# Altium PCB PD_SMARTKEY_EMN-EVAN_V2.0.PcbDoc (part 1 of 2)
Units mm, origin at the board's own origin, x right, y up, seen from the top; angles counter-clockwise.
Board outline 43.7 x 59.1 mm, 2 copper layers (Top Layer, Bottom Layer); 132 components, 88 nets, 381 pads, 398 vias.
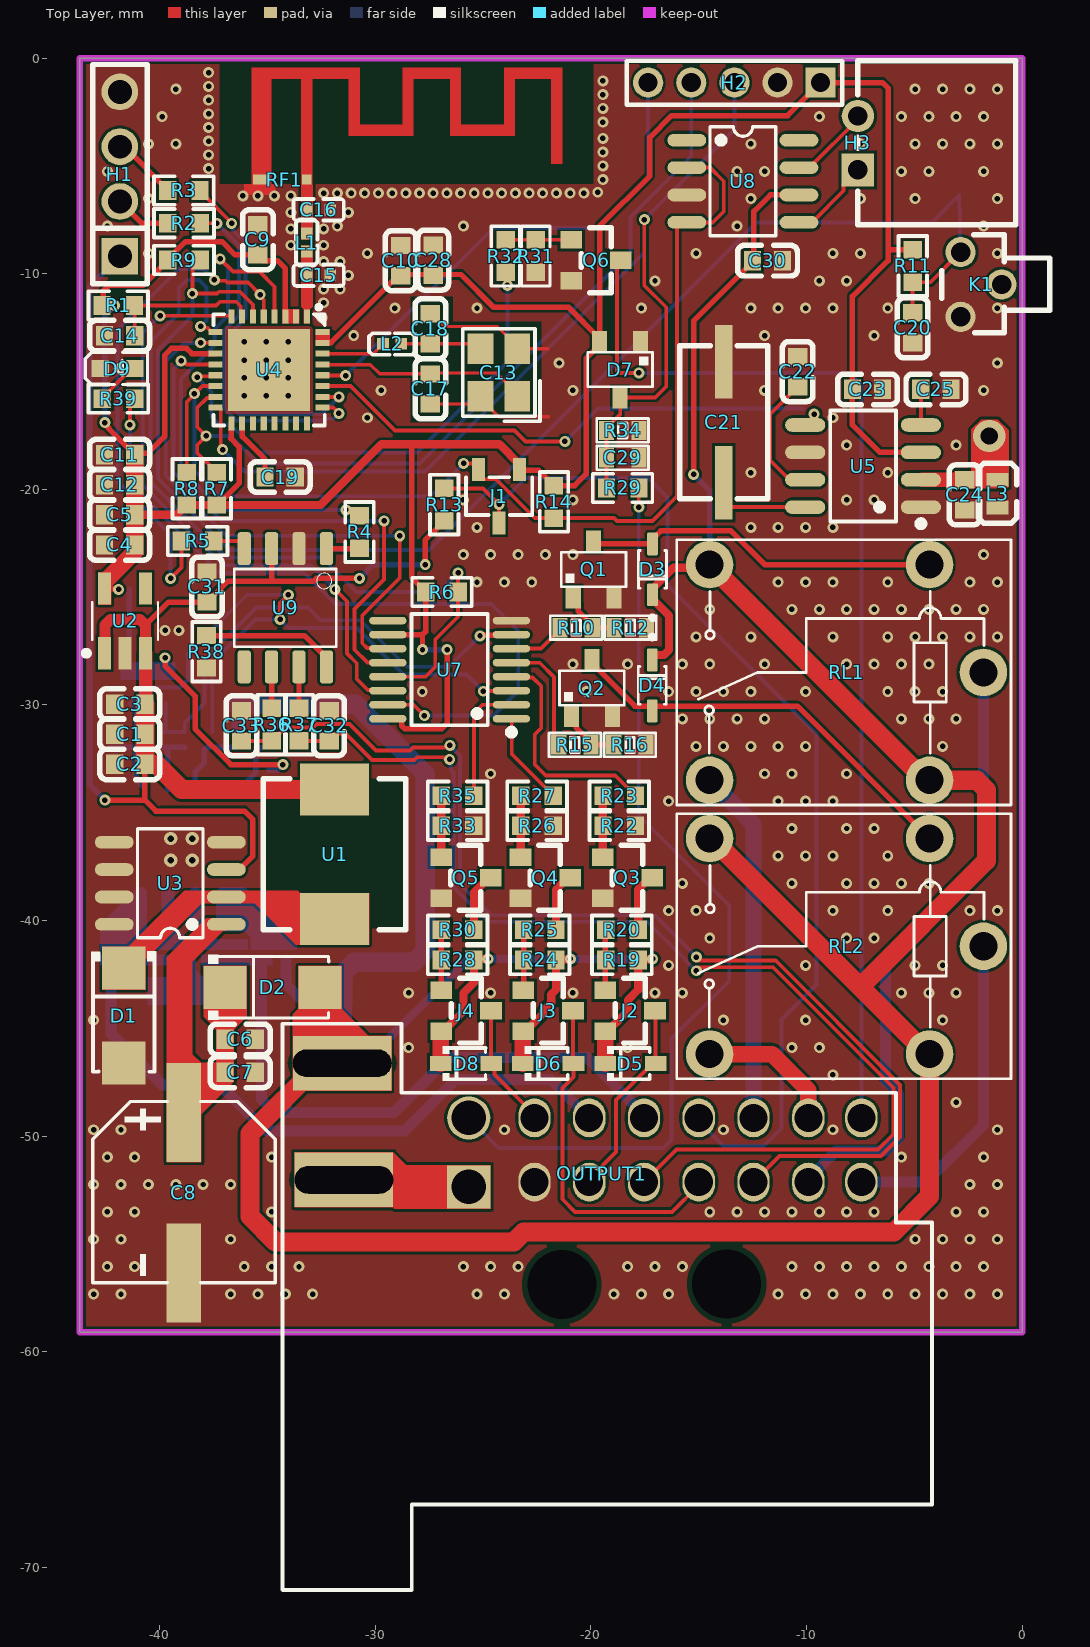
[diagram p0: Top Layer view]
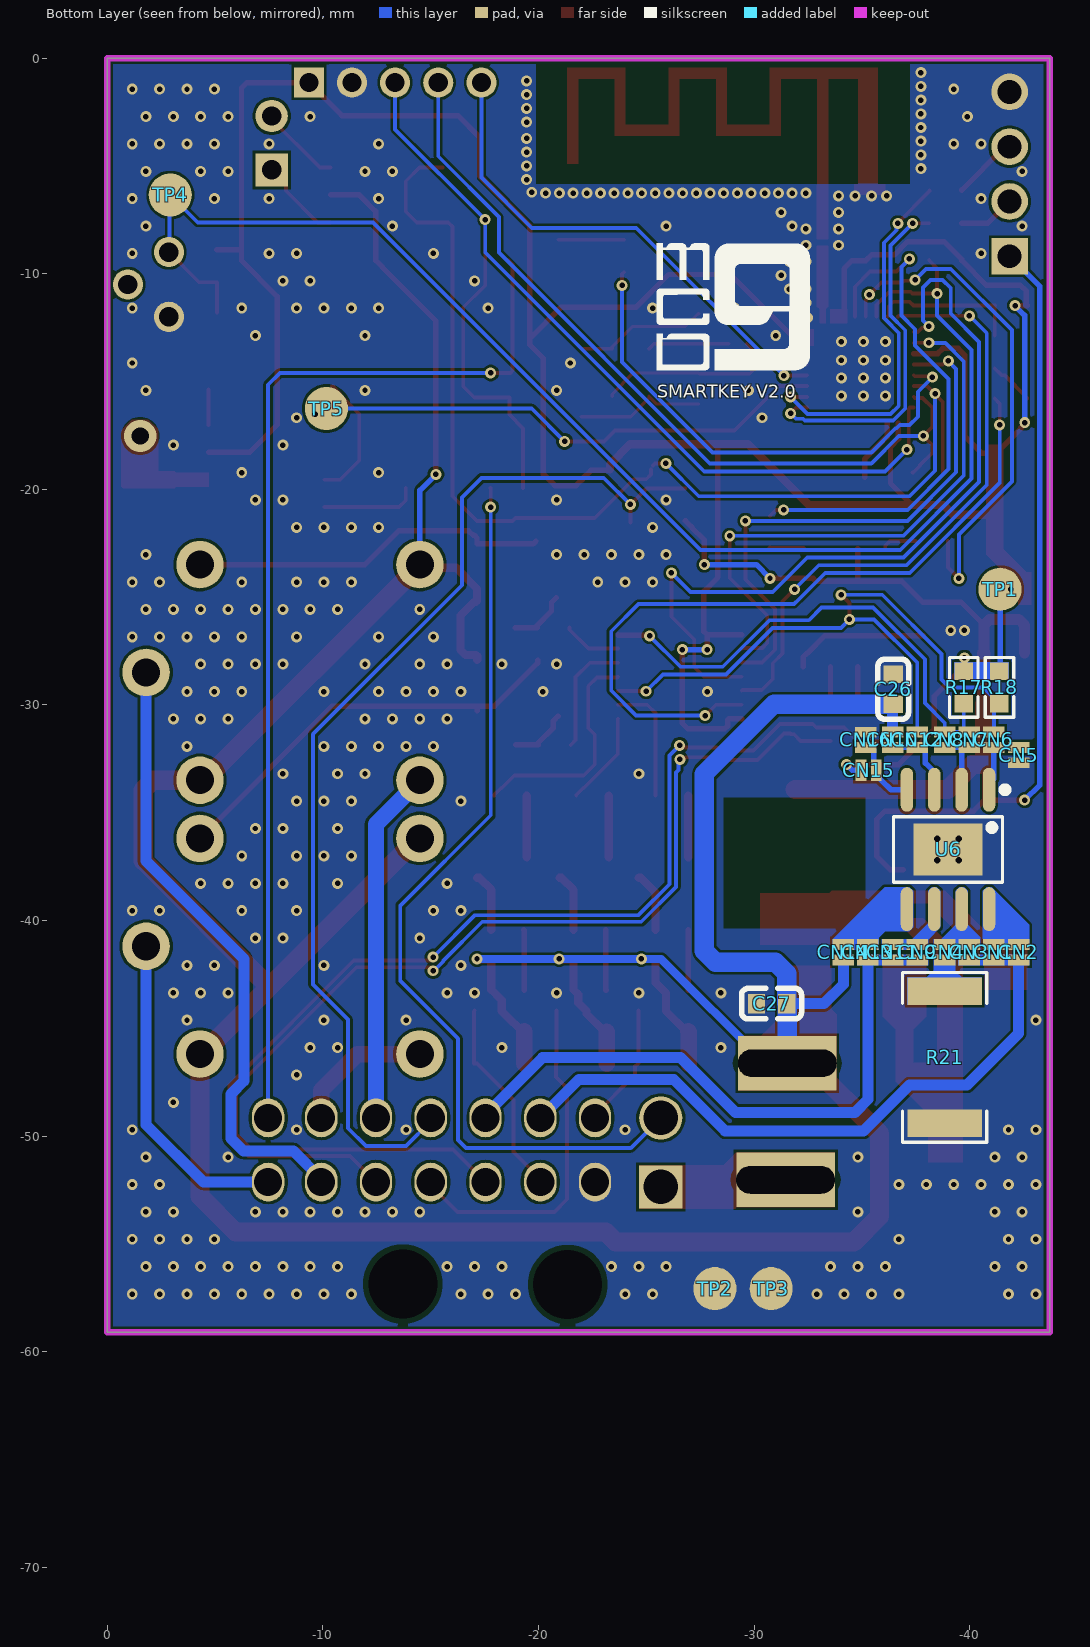
[diagram p1: Bottom Layer view, seen from below]
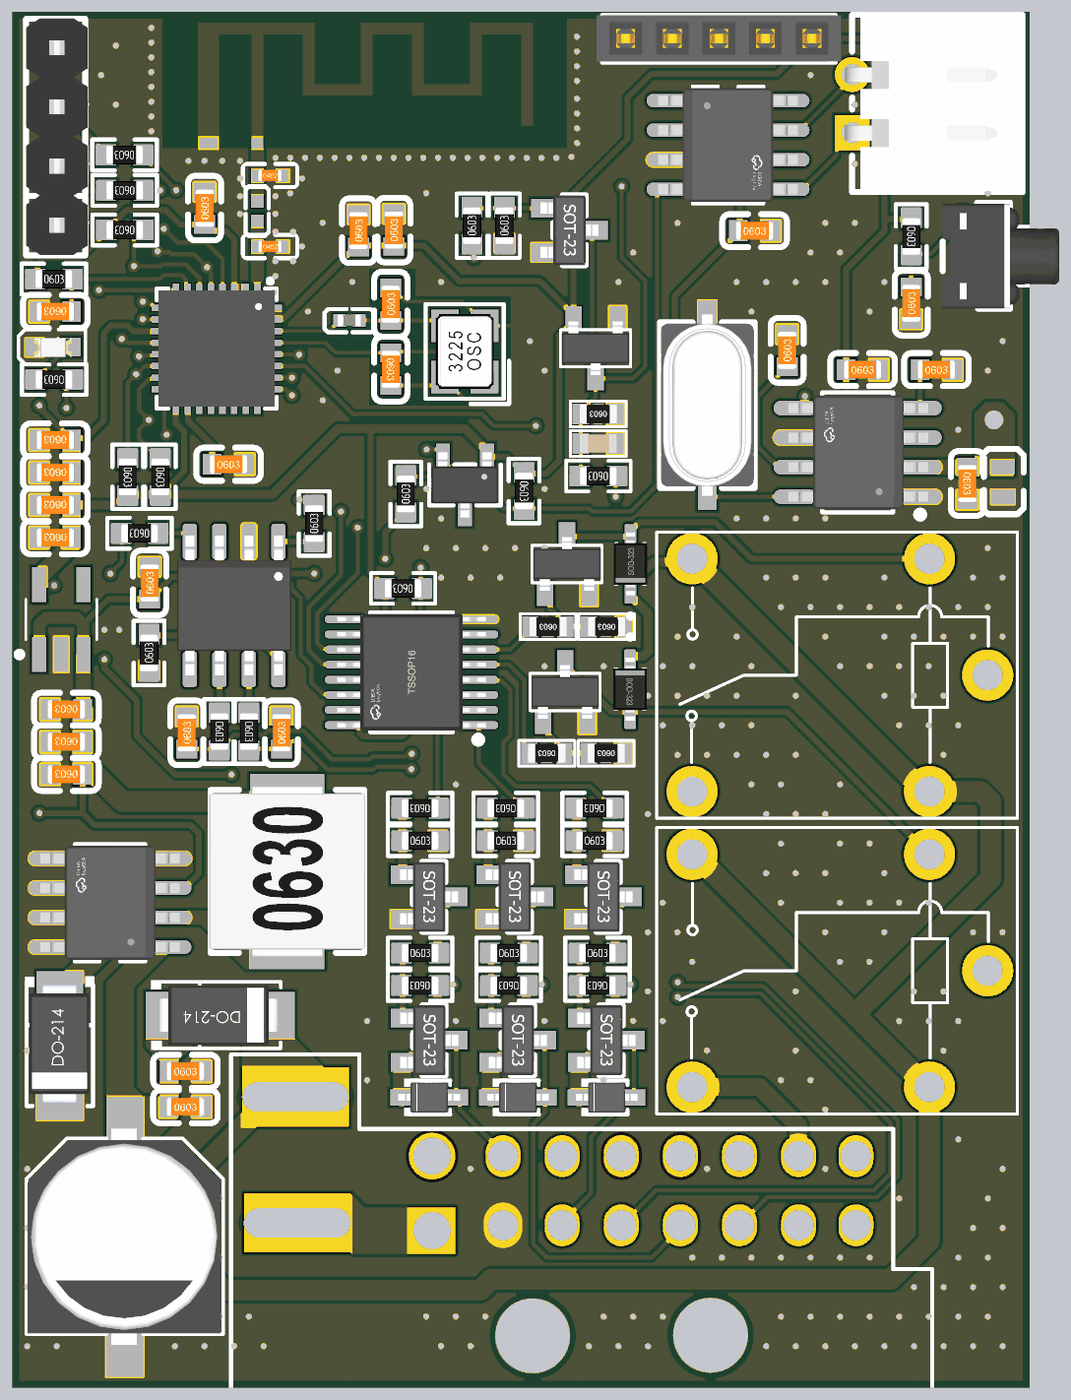
[diagram p3: 3D render of the assembled board from above, using the file's embedded part models]
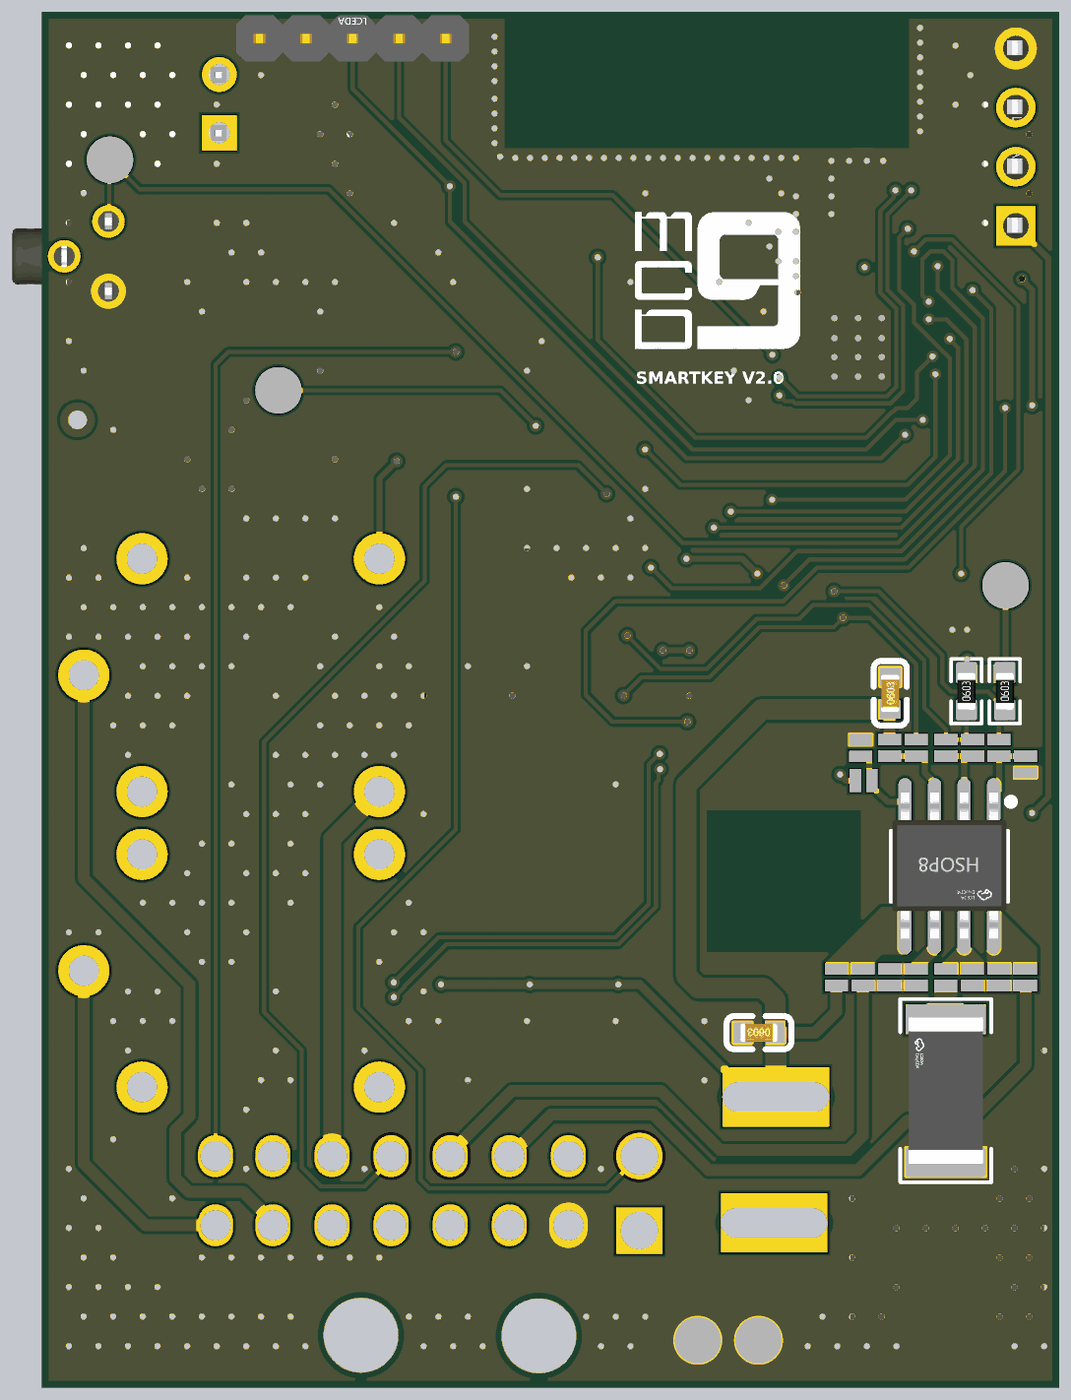
[diagram p4: 3D render of the assembled board from below, using the file's embedded part models]

## Layer stack, top to bottom
Top Solder: solder mask 0.0102, Solder Resist, Dk 3.5
Top Layer: signal copper 0.0356
Dielectric 1: dielectric 0.32, FR-4, Dk 4.8
Bottom Layer: signal copper 0.0356
Bottom Solder: solder mask 0.0102, Solder Resist, Dk 3.5

## Board outline
-43.7,-59.1 -43.7,0 0,0 0,-59.1

## Design rules (kind name [scope] priority, off if disabled: settings)
BoardOutlineClearance [All] p1: gap=0.2 ignorepadtopadclearanceinfootprint=FALSE
Clearance Clearance_2 [InNet('NetC18_1') Or InNet('NetC17_1') vs InNet('GND') And InPolygon] p1: gap=0.115 ignorepadtopadclearanceinfootprint=FALSE
Clearance Clearance_1 [IsTrack vs IsTrack] p2: gap=0.178 ignorepadtopadclearanceinfootprint=FALSE
Clearance [All] p3: gap=0.127 ignorepadtopadclearanceinfootprint=FALSE except(0.25: Arc-Hole Track-Hole SMDPad-Hole THPad-Hole Via-Hole Fill-Hole Poly-Hole Region-Hole Text-Hole)
ComponentClearance [All] p1: gap=0.127 collisioncheckmode=3 verticalgap=0.127 showdistances=TRUE
DiffPairsRouting [All] p1: maxlimit=0.254 minlimit=0.127 mostfreqgap=0.127 toplayer_minwidth=0.127 toplayer_maxwidth=25.4 toplayer_prefwidth=0.127 bottomlayer_minwidth=0.127 bottomlayer_maxwidth=25.4 bottomlayer_prefwidth=0.127 maxuncoupledlength=12.7
Height [All] p1: minheight=0 maxheight=1816.048 prefheight=12.7
HoleSize [All] p1: absolutevalues=TRUE maxlimit=6.3 minlimit=0.025 maxpercent=80.000 minpercent=20.000
HoleToHoleClearance [All] p1: gap=0.013 allowstackedmicrovias=FALSE
MinimumAnnularRing [All] p1: minimumring=0.076
MinimumSolderMaskSliver [All] p1: minsoldermaskwidth=0
PlaneClearance [All] p1: clearance=0.127
PlaneConnect PlaneConnectPowerPads [InPadClass('PowerPads')] p1: planeconnectstyle=Direct reliefexpansion=0.508 reliefentries=4 reliefconductorwidth=0.254 reliefairgap=0.254
PlaneConnect [All] p2: pad.planeconnectstyle=Relief pad.reliefexpansion=0.3 pad.reliefentries=4 pad.reliefconductorwidth=0.127 pad.reliefairgap=0.127 via.planeconnectstyle=Direct via.reliefexpansion=0.3 via.reliefentries=4 via.reliefconductorwidth=0.127 via.reliefairgap=0.127
PolygonConnect PolygonConnectPowerPads [All vs (InPadClass('PowerPads'))] p1: connectstyle=Direct reliefconductorwidth=0.254 reliefentries=4 polygonreliefangle="90 Angle" airgapwidth=0.254
PolygonConnect [All] p2: connectstyle=Direct reliefconductorwidth=0.127 reliefentries=4 polygonreliefangle="90 Angle" airgapwidth=0.127
RoutingVias [All] p1: holewidth=0.254 width=0.508 viastyle="Through Hole" minholewidth=0.254 minwidth=0.508 maxholewidth=0.254 maxwidth=0.508
SilkToSilkClearance [All] p1: silktosilkclearance=0
SilkToSolderMaskClearance [IsPad] p1: minsilkscreentomaskgap=0.127 clearancetoexposedcopper=TRUE
SolderMaskExpansion [All] p1: expansion=0.075 istentingtop=FALSE
Width [All] p1: maxlimit=25.4 minlimit=0.127 preferedwidth=0.127 minimp=50.000000 maximp=50.000000 favimp=50.000000
20 further rules are at their usual default settings.

## Classes and differential pairs
component class "Voltage Source": C1 C2 C3 C4 C5 C6 C7 C8 D1 D2 TP1 U1 U2 U3
component class Peripheral: C20 C21 C22 C23 C24 C25 C26 C27 C28 C29 C30 C31 C32 C33 CN1 CN2 CN3 CN4 CN5 CN6 CN7 CN8 CN9 CN10 CN11 CN12 CN13 CN14 CN15 CN16 D3 D4 D5 D6 D7 D8 D9 H2 J1 J2 J3 J4 K1 L3 Q1 Q2 Q3 Q4 Q5 Q6 R10 R11 R12 R13 R14 R15 R16 R17 R18 R19 R20 R21 R22 R23 R24 R25 R26 R27 R28 R29 R30 R31 R32 R33 R34 R35 R36 R37 R38 R39 RL1 RL2 TP4 TP5 U5 U6 U7 U8 U9
component class "Micro Controller": C9 C10 C11 C12 C13 C14 C15 C16 C17 C18 C19 H1 L1 L2 R1 R2 R3 R4 R5 R6 R7 R8 R9 RF1 TP2 TP3 U4
component class Connector: H3 OUTPUT1
differential pair CAN: +CAN_P -CAN_N
differential pair D: +D_P -D_N

## Components (designator, comment, footprint, x,y, rotation, side; value= is the part's Value field where it differs from the comment)
C1 "10uF" C0603 -41.385,-31.357 r180 top
C2 "100pF" C0603 -41.385,-32.754 r180 top
C3 "10uF" C0603 -41.385,-29.96 r180 top
C4 "10uF" C0603 -41.86,-22.582 r180 top
C5 "100nF" C0603 -41.86,-21.185 r180 top
C6 "10uF" C0603 -36.269,-45.511 r0 top
C7 "100pF" C0603 -36.269,-47.035 r0 top
C8 "220uF" C_220uF_35V_SMD -38.874,-52.623 r270 top
C9 "1uF" C0603 -35.445,-8.427 r90 top
C10 "10uF" C0603 -28.829,-9.398 r90 top
C11 "10uF" C0603 -41.86,-18.391 r180 top
C12 "100nF" C0603 -41.86,-19.788 r180 top
C13 "XL2EL89CPI-111YLC-40M" XL2EL89CPI-111YLC-40M -24.269,-14.585 r90 top
C14 "1uF" C0603 -41.86,-12.872 r180 top
C15 "NC" C0402 -32.63,-10.078 r0 top
C16 "NC" C0402 -32.63,-7.03 r0 top
C17 "12pF" C0603 -27.444,-15.347 r270 top
C18 "12pF" C0603 -27.444,-12.553 r90 top
C19 "100nF" C0603 -34.417,-19.431 r0 top
C20 "100nF" C0603 -5.08,-12.511 r90 top
C21 "6.7458M 12PF 20PPM" "6.7458M 12PF 20PPM" -13.843,-16.891 r90 top
C22 "4.7uF" C0603 -10.414,-14.54 r90 top
C23 "10uF" C0603 -7.174,-15.367 r0 top
C24 "8.2pF" C0603 -2.667,-20.258 r270 top
C25 "2.2uF" C0603 -3.999,-15.367 r0 top
C26 "100nF" C0603 -36.449,-29.272 r90 bottom
C27 "100nF" C0603 -30.807,-43.854 r0 bottom
C28 "10uF" C0603 -27.313,-9.371 r90 top
C29 "100nF" C-0603 -18.53,-18.542 r180 top value=103
C30 "10uF" C0603 -11.811,-9.398 r0 top
C31 "100nF" C0603 -37.807,-24.531 r90 top
C32 "12pF" C0603 -32.143,-30.968 r90 top
C33 "12pF" C0603 -36.207,-30.968 r90 top
CN1 "CN" CN -41.119,-41.472 r270 top
CN2 "CN" CN -42.262,-41.472 r270 top
CN3 "CN" CN -39.976,-41.472 r270 top
CN4 "CN" CN -38.833,-41.472 r270 top
CN5 "CN" CN -42.262,-32.328 r90 top
CN6 "CN" CN -41.119,-31.616 r270 top
CN7 "CN" CN -39.984,-31.616 r270 top
CN8 "CN" CN -38.841,-31.616 r270 top
CN9 "CN" CN -37.563,-41.472 r270 top
CN10 "CN" CN -36.42,-31.616 r270 top
CN11 "CN" CN -36.42,-41.472 r270 top
CN12 "CN" CN -37.563,-31.616 r270 top
CN13 "CN" CN -35.277,-41.472 r270 top
CN14 "CN" CN -34.134,-41.472 r270 top
CN15 "CN" CN -35.306,-33.02 r180 top
CN16 "CN" CN -35.179,-31.623 r270 top
D1 "SS34" SS34 -41.668,-44.409 r270 top
D2 "SS34" SS34 -34.769,-43.098 r0 top
D3 "1N5819" SOD-323 -17.145,-23.712 r90 top value=1N5007
D4 "1N5819" SOD-323 -17.16,-29.097 r270 top value=1N5007
D5 "1N4007WS" 1N4007WS -18.173,-46.635 r0 top
D6 "1N4007WS" 1N4007WS -21.983,-46.635 r0 top
D7 "BAT54S" SOT23-3 -18.645,-14.448 r180 top
D8 "1N4007WS" 1N4007WS -25.793,-46.635 r0 top
D9 "RED" LED0603 -41.959,-14.4 r0 top
H1 "PZ2.54-S04P-A60" J_4P_XH2.54 -41.846,-5.379 r90 top
H2 "HC-PM200-4.3H-1x5PZ" JC_5P_XH2.0 -13.347,-1.15 r180 top
H3 "ZX-XH2.54-2PWZ" ZX-XH2.54-2PWZ -7.62,-3.937 r90 top
J1 "BSS138" BSS138 -24.257,-20.32 r90 top
J2 "AO3401A" AO3401 -18.18,-44.18 r180 top
J3 "AO3401A" AO3401 -21.983,-44.18 r180 top
J4 "AO3401A" AO3401 -25.786,-44.18 r180 top
K1 "TS-1009B-05026" TS-1009B-05026 -1.905,-10.5 r90 top
L1 "LQG15HS1N0B02D" L0402_1nH -33.175,-8.554 r270 top
L2 "LQW15AN24NG00D" LQW15AN24NG00D -29.222,-13.253 r0 top
L3 "16,6nH" L_16,6nH_0603 -1.143,-20.18 r90 top
OUTPUT1 "JP9x2" 9x2_JP200 -19.09,-58.504 r0 top locked
Q1 "AO3402" SOT23-3 -19.873,-23.719 r0 top
Q2 "AO3402" SOT23-3 -19.954,-29.217 r0 top
Q3 "AO3402" AO3402 -18.307,-38.018 r180 top
Q4 "AO3402" AO3402 -22.117,-38.018 r180 top
Q5 "AO3402" AO3402 -25.8,-38.018 r180 top
Q6 "AO3402" AO3402 -19.759,-9.379 r180 top
R1 "10kΩ" R0603 -41.922,-11.475 r0 top
R2 "22" R0603 -38.874,-7.665 r180 top
R3 "22" R0603 -38.883,-6.141 r180 top
R4 "33Ω" R0603 -30.734,-21.98 r90 top
R5 "33Ω" R0603 -38.239,-22.397 r180 top
R6 "10kΩ" R0603 -26.915,-24.765 r180 top
R7 "10kΩ" R0603 -37.35,-19.975 r270 top
R8 "10kΩ" R0603 -38.747,-19.975 r270 top
R9 "10kΩ" R0603 -38.874,-9.367 r180 top
R10 "1K" RES-SMD-0603 -20.689,-26.416 r180 top
R11 "10kΩ" R0603 -5.08,-9.643 r270 top
R12 "10K" RES-SMD-0603 -18.173,-26.416 r180 top
R13 "10kΩ" R0603 -26.797,-20.71 r90 top
R14 "10kΩ" R0603 -21.717,-20.583 r270 top
R15 "1K" RES-SMD-0603 -20.744,-31.853 r180 top
R16 "10K" RES-SMD-0603 -18.192,-31.853 r180 top
R17 "10kΩ" R0603 -39.722,-29.187 r90 bottom
R18 "10kΩ" R0603 -41.373,-29.187 r90 bottom
R19 "10kΩ" R0603 -18.563,-41.828 r180 top
R20 "5k1Ω" R0603 -18.563,-40.431 r0 top
R21 "FRC2512P000 TS" "R_2512_0O ±5%" -38.833,-46.341 r270 bottom
R22 "10kΩ" R0603 -18.69,-35.605 r0 top
R23 "1kΩ" R0603 -18.69,-34.208 r180 top
R24 "10kΩ" R0603 -22.373,-41.828 r180 top
R25 "5k1Ω" R0603 -22.373,-40.431 r0 top
R26 "10kΩ" R0603 -22.5,-35.605 r0 top
R27 "1kΩ" R0603 -22.5,-34.208 r180 top
R28 "10kΩ" R0603 -26.183,-41.828 r180 top
R29 "33kΩ" R0603 -18.527,-19.939 r180 top
R30 "5k1Ω" R0603 -26.183,-40.431 r0 top
R31 "10kΩ" R0603 -22.56,-9.182 r90 top
R32 "1kΩ" R0603 -23.957,-9.182 r90 top
R33 "10kΩ" R0603 -26.183,-35.605 r0 top
R34 "10K" RES-SMD-0603 -18.53,-17.272 r180 top
R35 "1kΩ" R0603 -26.183,-34.208 r180 top
R36 "33Ω" R0603 -34.81,-30.915 r270 top
R37 "33Ω" R0603 -33.54,-30.915 r270 top
R38 "33Ω" R0603 -37.833,-27.536 r90 top
R39 "1kΩ" R0603 -41.913,-15.793 r180 top
RF1 "" 2.4GHZ-50OHMS_v1.1 -35.278,-5.862 r0 top
RL1 "SRA-12VDC-CL" YL318-DC12V-C -8.267,-28.493 r0 top value="Relay SPDT, 10A, 12V"
RL2 "SRA-12VDC-CL" YL318-DC12V-C -8.267,-41.193 r0 top value="Relay SPDT, 10A, 12V"
TP1 "TP" TP -41.402,-24.638 r0 top
TP2 "TP" TP -28.178,-57.071 r0 top
TP3 "TP" TP -30.787,-57.071 r0 top
TP4 "TP" TP -2.921,-6.35 r0 top
TP5 "TP" TP -10.16,-16.256 r0 top
U1 "XR0630-4R7M" SMD,7x6.6mm -31.889,-36.923 r90 top
U2 "AP2112K-3.3TRG1" SOT23-5 -41.602,-26.104 r90 top
U3 "XXL1509-5.0" XXL1509-5.0 -39.509,-38.272 r90 top
U4 "ESP32-C3" ESP32-C3 -34.925,-14.461 r270 top
U5 "SYN480R" SYN480R -7.381,-18.923 r90 top
U6 "DRV8870DDAR" DRV8870DDAR -38.989,-36.703 r0 bottom
U7 "74HC595PW,118" 74HC595PW,118 -26.555,-28.366 r90 top
U8 "TC4428AEOA" TC4428AEOA -12.954,-5.715 r270 top
U9 "SIT1040T" SO8 -34.175,-25.496 r180 top

## Footprints (in the part's own frame and the unit in brackets; to place one, negate y for a bottom-side part, rotate by r counter-clockwise, add the part's x,y. Pads: shape width x height; smd on the part's side, far side on the other; paste and mask are expansions set on the pad)
1N4007WS [mm] "DIODE STANDARD 1kV 1A SOD-323"
  rect 1x0.7 smd paste+0 mask+0.051: 1(-1.173,0) 2(1.173,0)
  silkscreen extent -1.08,-0.8 0.9,0.8, body extent -1.33,-0.65 1.33,0.65, height 1.21
2.4GHZ-50OHMS_v1.1 [mm]
  rect 0.45x0.45 smd: 1(2.103,0.229)
  rect 0.8x0.45 smd: 2(0,0.229)
  Top Layer region: 13.947,0.963 13.447,0.963 13.447,4.903 11.747,4.903 11.747,2.263 8.747,2.263 8.747,4.903 7.047,4.903 7.047,2.263 4.047,2.263 4.047,4.903 2.347,4.903 2.347,0.003 1.847,0.003 1.847,4.903 0.447,4.903 0.447,0.003 -0.453,0.003 -0.453,5.403 4.547,5.403 4.547,2.763 6.547,2.763 6.547,5.403 9.247,5.403 9.247,2.763 11.247,2.763 11.247,5.403 13.947,5.403
"6.7458M 12PF 20PPM" [mm] "CRYSTAL 6.7458MHz 12pF SMD"
  rect 3.4x0.8 smd paste+0 mask+0.05: 1(-2.8,0) 2(2.8,0)
  silkscreen extent -3.56,-2.03 3.56,2.03, body extent -3.9,-2 3.9,2, height 2.35
9x2_JP200 [mm]
  rect 2x2 hole 1.6 paste-2539.97: 1(-6.579,6.147)
  oval 1.5x1.8 hole 1.3: 2(-3.531,6.375) 3(-0.991,6.375) 4(1.549,6.375) 5(4.089,6.375) 6(6.629,6.375) 7(9.169,6.375) 8(11.633,6.375) 9(11.633,9.347) 10(9.169,9.347) 11(6.629,9.347) 14(-0.991,9.347) 15(-3.531,9.347)
  oval 1.5x1.8 hole 1.3 mask+0.127: 12(4.089,9.347) 13(1.549,9.347)
  round 2 hole 1.6 mask+0.127: 16(-6.579,9.347)
  rect 4.572x2.54 hole 1.27 slot 4.572 at 0 deg: 17(-12.446,11.887) 18(-12.37,6.477)
  round 1.524 hole 3.2: ""(-2.261,1.626) ""(5.385,1.651)
  silkscreen extent -15.21,-12.55 14.91,13.72, body extent -15.21,-12.55 14.91,13.72, height 17
74HC595PW,118 [mm] "8-bit serial-in, serial or parallel-out shift register with output latches; 3-state"
  oval 0.343x1.731 smd paste+0 mask+0.051: 1(-2.275,-2.866) 2(-1.625,-2.866) 3(-0.975,-2.866) 4(-0.325,-2.866) 5(0.325,-2.866) 6(0.975,-2.866) 7(1.625,-2.866) 8(2.275,-2.866) 9(2.275,2.866) 10(1.625,2.866) 11(0.975,2.866) 12(0.325,2.866) 13(-0.325,2.866) 14(-0.975,2.866) 15(-1.625,2.866) 16(-2.275,2.866)
  silkscreen extent -3.05,-3.02 2.58,1.77, body extent -2.5,-3.2 2.5,3.2, height 1.03
AO3401 [mm]
  rect 1x0.8 smd paste+0 mask+0.051: 1(1.15,-0.95) 2(1.15,0.95) 3(-1.15,0)
  silkscreen extent -0.7,-1.5 0.7,1.5, body extent -1.25,-1.5 1.25,1.5, height 1.1
AO3402 [mm] "MOSFET N-CH 30V SOT-23"
  rect 1x0.8 smd paste+0 mask+0.051: 1(1.15,-0.95) 2(1.15,0.95) 3(-1.15,0)
  silkscreen extent -0.7,-1.5 0.7,1.5, body extent -1.25,-1.5 1.25,1.5, height 1.1
BSS138 [mm] "MOSFET N-CH 50V 0.22A SOT-23"
  rect 1.07x0.6 smd paste+0 mask+0.051: 1(1.235,-0.95) 2(1.235,0.95) 3(-1.235,0)
  silkscreen extent -0.88,-1.54 0.88,1.54, body extent -1.4,-1.45 1.4,1.45, height 1.1
C0402 [mm]
  rect 0.54x0.54 smd paste-100 mask+0.051: 1(-0.545,0) 2(0.545,0)
  silkscreen extent -1.17,-0.5 1.17,0.5, body extent -0.5,-0.25 0.5,0.25, height 0.36
C0603 [mm]
  rect 0.8x0.9 smd: 1(-0.7,0) 2(0.7,0)
  silkscreen extent -1.39,-0.71 1.39,0.71, body extent -0.8,-0.4 0.8,0.4, height 0.4
C-0603 [mm]
  rect 0.7x0.9 smd: 1(-0.75,0) 2(0.75,0)
  silkscreen extent -1.2,-0.55 1.2,0.55, body extent -0.8,-0.4 0.8,0.4, height 0.8
C_220uF_35V_SMD [mm] "CAP ALUM 220uF ±20% 35V SMD"
  rect 4.6x1.6 smd paste+0 mask+0.051: 1(-3.724,0) 2(3.724,0)
  silkscreen extent -4.23,-4.23 4.18,4.23, body extent -4.65,-4.18 4.65,4.12, height 10.13
CN [mm]
  rect 0.5x1 smd far side paste+0 mask+0.051: 1(-0.356,0) 2(0.356,0)
DRV8870DDAR [mm] "Brushed DC motor driver (PWM control)"
  oval 0.574x2.038 smd paste+0 mask+0.051: 1(-1.905,-2.769) 2(-0.635,-2.769) 3(0.635,-2.769) 4(1.905,-2.769) 5(1.905,2.769) 6(0.635,2.769) 7(-0.635,2.769) 8(-1.905,2.769)
  rect 3.2x2.4 smd paste+0 mask+0.051: 9(0,0)
  silkscreen extent -2.79,-2.92 2.53,1.52, body extent -2.45,-3.18 2.45,3.12, height 1.9
ESP32-C3 [mm] "Others 160MHz QFN-32-EP(5x5) RF Transceiver Modules and Modems RoHS"
  rect 0.65x0.28 smd paste-100 mask+0.051: 1(-2.478,1.75) 2(-2.478,1.25) 3(-2.478,0.75) 4(-2.478,0.25) 5(-2.478,-0.25) 6(-2.478,-0.75) 7(-2.478,-1.25) 8(-2.478,-1.75) 17(2.478,-1.75) 18(2.478,-1.25) 19(2.478,-0.75) 20(2.478,-0.25) 21(2.478,0.25) 22(2.478,0.75) 23(2.478,1.25) 24(2.478,1.75)
  rect 0.28x0.65 smd paste-100 mask+0.051: 9(-1.75,-2.478) 10(-1.25,-2.478) 11(-0.75,-2.478) 12(-0.25,-2.478) 13(0.25,-2.478) 14(0.75,-2.478) 15(1.25,-2.478) 16(1.75,-2.478) 25(1.75,2.478) 26(1.25,2.478) 27(0.75,2.478) 28(0.25,2.478) 29(-0.25,2.478) 30(-0.75,2.478) 31(-1.25,2.478) 32(-1.75,2.478)
  rect 3.8x3.8 smd paste-100 mask+0.051: 33(0,0)
  silkscreen extent -3,-2.58 2.58,2.58, body extent -2.5,-2.5 2.5,2.5, height 0.9
J_4P_XH2.54 [mm] "1kV 1 2.54mm Pin Header 3A 2.5mm Through Hole 6mm -40?~+105? 3mm Gold 4P Black 1x4P Through Hole,P=2.54mm Headers, Male Pins RoHS"
  rect 1.7x1.7 hole 1.1 paste-2539.97 mask+0.051: 1(-3.81,0)
  round 1.7 hole 1.1 paste-2539.97 mask+0.051: 2(-1.27,0) 3(1.27,0) 4(3.81,0)
  silkscreen extent -5.08,-1.27 5.08,1.27, body extent -5.05,-1.38 5.12,1.28, height 8.54
JC_5P_XH2.0 [mm] "CONN SOCKET 5POS 2mm SINGLE ROW TH"
  rect 1.4x1.4 hole 0.889 paste-2539.97 mask+0.051: 1(-4,-0.013)
  round 1.4 hole 0.889 paste-2539.97 mask+0.051: 2(-2,-0.013) 3(0,-0.013) 4(2,-0.013) 5(4,-0.013)
  silkscreen extent -5,-1.01 5,1.01, body extent -5.25,-1.01 5.26,0.99, height 6.35
L0402_1nH [mm]
  rect 0.54x0.54 smd paste+0 mask+0.051: 1(-0.42,0) 2(0.42,0)
  silkscreen extent -1.07,-0.51 1.07,0.49
L_16,6nH_0603 [mm] "700mA 16nH ±5% 170mO Wire-wound inductor 0603 Fixed Inductors"
  rect 0.64x1.02 smd paste+0 mask+0.051: 1(-0.658,0) 2(0.622,0)
  silkscreen extent -1.4,-0.89 1.4,0.89
LED0603 [mm]
  rect 0.8x0.8 smd paste+0 mask+0.051: 1(-0.799,-0.004) 2(0.799,0.004)
  silkscreen extent -1.49,-0.75 1.39,0.76, body extent -0.8,-0.42 0.8,0.38, height 0.7
LQW15AN24NG00D [mm] "FIXED IND 24nH 280mA 520mO 0402"
  rect 0.54x0.54 smd paste+0 mask+0.051: 1(-0.42,0) 2(0.42,0)
  silkscreen extent -1.07,-0.51 1.07,0.49, body extent -0.5,-0.25 0.5,0.25, height 0.5
R0603 [mm]
  rect 0.806x0.864 smd paste-100 mask+0.051: 1(-0.753,0) 2(0.753,0)
  silkscreen extent -1.39,-0.66 1.39,0.66, body extent -0.8,-0.4 0.8,0.4, height 0.45
"R_2512_0O ±5%" [mm] "RES 0O ±5% 1W 2512"
  rect 1.283x3.456 smd paste-100 mask+0.051: 1(-3.066,0) 2(3.066,0)
  silkscreen extent -3.94,-1.96 3.94,1.96, body extent -3.15,-1.6 3.15,1.6, height 0.61
RES-SMD-0603 [mm]
  rect 0.7x0.9 smd: 1(-0.75,0) 2(0.75,0)
  silkscreen extent -1.2,-0.55 1.2,0.55, body extent -0.8,-0.4 0.8,0.4, height 0.43
SMD,7x6.6mm [mm] "FIXED IND 4.7uH 6A 33mO SMD,0630"
  rect 2.4x3.2 smd paste+0 mask+0.051: 1(-3,0) 2(3,0)
  silkscreen extent -3.5,-3.3 3.5,3.3, body extent -3.65,-3.35 3.65,3.35, height 3.01
SO8 [mil]
  rrect40% 24x60 smd: 1(-75,-108) 2(-25,-108) 3(25,-108) 4(75,-108) 5(75,108) 6(25,108) 7(-25,108) 8(-75,108)
  silkscreen extent -93,-71 93,71, body extent -96,-118 96,118, height 69
SOD-323 [mm]
  rrect25% 1.06x0.5 smd: 1(1.18,0) 2(-1.18,0)
  silkscreen extent -2.35,-0.65 0.87,0.65, body extent -1.35,-0.72 1.35,0.72, height 1.17
SOT23-3 [mm]
  rect 0.7x1 smd: 1(-0.95,-1.3) 2(0.95,-1.3) 3(0,1.3)
  silkscreen extent -1.5,-0.8 1.5,0.8, body extent -1.45,-1.15 1.45,1.15, height 1.1
SOT23-5 [mm]
  rect 1.5x0.6 smd: 1(-1.5,0.95) 2(-1.5,0) 3(-1.5,-0.95) 4(1.5,-0.95) 5(1.5,0.95)
  silkscreen extent -1.62,-1.52 0.87,1.92, body extent -1.75,-1.52 1.75,1.53, height 1.45
SS34 [mm]
  rect 2x2 smd paste+0 mask+0.051: 1(-2.2,0) 2(2.2,0)
  silkscreen extent -2.98,-1.5 2.6,1.5, body extent -2.65,-1.29 2.49,1.27, height 2.63
SYN480R [mm] "433/315 MHz wireless receiver chips"
  oval 0.63x1.865 smd paste+0 mask+0.051: 1(-1.905,-2.682) 2(-0.635,-2.682) 3(0.635,-2.682) 4(1.905,-2.682) 5(1.905,2.682) 6(0.635,2.682) 7(-0.635,2.682) 8(-1.905,2.682)
  silkscreen extent -2.82,-2.83 2.58,1.52, body extent -2.45,-3.03 2.45,2.97, height 1.49
TC4428AEOA [mm] "1.5A Dual High-Speed Power MOSFET Drivers"
  oval 0.588x1.8 smd paste+0 mask+0.051: 1(-1.905,-2.6) 2(-0.635,-2.6) 3(0.635,-2.6) 4(1.905,-2.6) 5(1.905,2.6) 6(0.635,2.6) 7(-0.635,2.6) 8(-1.905,2.6)
  silkscreen extent -2.53,-1.52 2.53,1.52, body extent -2.45,-3 2.45,3, height 1.51
TP [mm]
  round 2 smd far side paste+0 mask+0.051: 1(0,0)
TS-1009B-05026 [mm] "SWITCH TACTILE SPST TH R/A"
  round 1.4 hole 0.9 paste-2539.97 mask+0.051: 1(1.5,0.95) 2(-1.5,0.95) 3(0,-0.95)
  silkscreen extent -2.25,-3.18 2.3,1.83, body extent -2.25,-3.17 2.25,1.83, height 4.51
XL2EL89CPI-111YLC-40M [mm] "CRYSTAL 40MHz 15pF SMD"
  rect 1.4x1.2 smd paste+0 mask+0.051: 1(-1.1,-0.85) 2(1.1,-0.85) 3(1.1,0.85) 4(-1.1,0.85)
  silkscreen extent -2.26,-1.91 2.03,1.68, body extent -1.6,-1.25 1.6,1.25, height 0.68
XXL1509-5.0 [mm] "150KHz 3A PWM Buck DC/DC Converter"
  oval 0.588x1.8 smd paste+0 mask+0.051: 1(-1.905,-2.6) 2(-0.635,-2.6) 3(0.635,-2.6) 4(1.905,-2.6) 5(1.905,2.6) 6(0.635,2.6) 7(-0.635,2.6) 8(-1.905,2.6)
  silkscreen extent -2.53,-1.52 2.53,1.52, body extent -2.45,-3 2.45,3, height 1.51
YL318-DC12V-C [mm]
  round 2.2 hole 1.3: 1(6.47,0) 2(-6.23,-5) 3(-6.23,5) 4(3.97,5) 5(3.97,-5)
  silkscreen extent -7.75,-6.15 7.75,6.15, body extent -7.75,-6.15 7.75,6.15, height 13.5
ZX-XH2.54-2PWZ [mm] "CONN HEADER TH R/A 2POS 2.5mm"
  rect 1.524x1.5 hole 0.9 paste-2539.97 mask+0.05: 1(-1.25,0)
  round 1.5 hole 0.9 paste-2539.97 mask+0.05: 2(1.25,0)
  silkscreen extent -3.8,-7.32 3.81,0, body extent -3.77,-7.35 3.74,0.29, height 5.92

## Part data
C1 C6 C23 C28 C30: library part C0603_10uF_±1%, LCSC Part #=C513681, Manufacturer=YAGEO, Mfr. Part #=CC0402FRNPO9BN100, Package=0603, Tolerance=±1%, Voltage Rating=50V, Capacitance=10uF, Link=https://www.lcsc.com/product-detail/C513681.html?s_z=n_capital%2520yageo%252010pF%25200402
C2 C7: library part C0603_100pF_±1%, LCSC Part #=C513681, Manufacturer=YAGEO, Mfr. Part #=CC0402FRNPO9BN100, Package=0603, Tolerance=±1%, Voltage Rating=50V, Capacitance=100pF, Link=https://www.lcsc.com/product-detail/C513681.html?s_z=n_capital%2520yageo%252010pF%25200402
C3 C4 C10 C11: library part C0603_10uF_±1%, "50V 10pF NP0 ±1% 0402 Multilayer Ceramic Capacitors MLCC - SMD/SMT ROHS", LCSC Part #=C513681, Manufacturer=YAGEO, Mfr. Part #=CC0402FRNPO9BN100, Package=0603, Tolerance=±1%, Voltage Rating=50V, Capacitance=10uF, Link=https://www.lcsc.com/product-detail/C513681.html?s_z=n_capital%2520yageo%252010pF%25200402
C5 C12 C19 C31: library part C0603_100nF_±1%, "50V 10pF NP0 ±1% 0402 Multilayer Ceramic Capacitors MLCC - SMD/SMT ROHS", LCSC Part #=C513681, Manufacturer=YAGEO, Mfr. Part #=CC0402FRNPO9BN100, Package=0603, Tolerance=±1%, Voltage Rating=50V, Capacitance=100nF, Link=https://www.lcsc.com/product-detail/C513681.html?s_z=n_capital%2520yageo%252010pF%25200402
C8: library part C_220uF_35V_SMD, "CAP ALUM 220uF ±20% 35V SMD", LCSC Part #=C72498, Manufacturer=ROQANG, Mfr. Part #=RVT1V221M0810, Package=SMD,D8xL10.2mm, Link=https://www.lcsc.com/product-detail/C72498.html?s_z=n_q_t_220u%252035v&spm=wm.fly.bg.0.xh___wm.ssy.tc.0.tz&lcsc_vid=FlRcBlcDRFNZAlJQT1RZBVJSEVFcX11eRVQPBFEHFgAxVlNeT1ReUlJRRFFYVTsOAxUeFF5JWBYZEEoKFBINSQcJGk4NBhADEA4cHktfT1FADxALGw%3D%3D
C9 C14: library part C0603_1uF_±1%, "50V 10pF NP0 ±1% 0402 Multilayer Ceramic Capacitors MLCC - SMD/SMT ROHS", LCSC Part #=C513681, Manufacturer=YAGEO, Mfr. Part #=CC0402FRNPO9BN100, Package=0603, Tolerance=±1%, Voltage Rating=50V, Capacitance=1uF, Link=https://www.lcsc.com/product-detail/C513681.html?s_z=n_capital%2520yageo%252010pF%25200402
C13: "Crystal Oscillator 15pF SMD3225-4P Crystals RoHS", LCSC Part #=C5444549, Manufacturer="YXC Crystal Oscillators", Package=SMD3225-4P, Key Attributes="Crystal Oscillator 15pF SMD3225-4P Crystals RoHS", Link=https://www.lcsc.com/product-detail/C5444549.html?s_z=n_oscillator, Mfr. Part #=XL2EL89CPI-111YLC-40M
C15 C16: library part C0402_NC_±1%, Capacitance=1uF, LCSC Part #=C513681, Manufacturer=YAGEO, Mfr. Part #=CC0402FRNPO9BN100, Package=0402, Tolerance=±1%, Voltage Rating=50V, Link=https://www.lcsc.com/product-detail/C513681.html?s_z=n_capital%2520yageo%252010pF%25200402
C17 C18 C32 C33: library part C0603_12pF_±1%, "50V 10pF NP0 ±1% 0402 Multilayer Ceramic Capacitors MLCC - SMD/SMT ROHS", LCSC Part #=C513681, Manufacturer=YAGEO, Mfr. Part #=CC0402FRNPO9BN100, Package=0603, Tolerance=±1%, Voltage Rating=50V, Capacitance=12pF, Link=https://www.lcsc.com/product-detail/C513681.html?s_z=n_capital%2520yageo%252010pF%25200402
C20 C26 C27: library part C0603_100nF_±1%, LCSC Part #=C513681, Manufacturer=YAGEO, Mfr. Part #=CC0402FRNPO9BN100, Package=0603, Tolerance=±1%, Voltage Rating=50V, Capacitance=100nF, Link=https://www.lcsc.com/product-detail/C513681.html?s_z=n_capital%2520yageo%252010pF%25200402
C21: "CRYSTAL 6.7458MHz 12pF SMD", LCSC Part #=C4944008, Load Capacitance=20pF, Manufacturer=SOSET, Package=HC-49S-SMD-2P-Mini, Link=https://www.lcsc.com/product-detail/C4944008.html?utm_source=chatgpt.com, Mfr. Part #="6.7458M 12PF 20PPM"
C22: library part C0603_4.7uF_±10%, LCSC Part #=C710616, Manufacturer=muRata, Mfr. Part #=GCJ188C70J335KE02D, Package=0603, Temperature Coefficient=X7S, Tolerance=±10%, Voltage Rating=50V, Capacitance=4.7uF, Link=https://www.lcsc.com/product-detail/C710616.html?s_z=n_Capita%25200603%25203.3uF%2520yageo
C24: library part C0603_8.2pF_±10%, LCSC Part #=C710616, Manufacturer=muRata, Mfr. Part #=GCJ188C70J335KE02D, Package=0603, Temperature Coefficient=X7S, Tolerance=±10%, Voltage Rating=50V, Capacitance=8.2pF, Link=https://www.lcsc.com/product-detail/C710616.html?s_z=n_Capita%25200603%25203.3uF%2520yageo
C25: library part C0603_2.2uF_±10%, LCSC Part #=C710616, Manufacturer=muRata, Mfr. Part #=GCJ188C70J335KE02D, Package=0603, Temperature Coefficient=X7S, Tolerance=±10%, Voltage Rating=50V, Capacitance=2.2uF, Link=https://www.lcsc.com/product-detail/C710616.html?s_z=n_Capita%25200603%25203.3uF%2520yageo
C29: library part CM, "Cap SMD"
D1 D2: "40V Independent 3A 550mV@3A SMA(DO-214AC) Schottky Diodes ROHS", Current - Rectified=3A, LCSC Part #=C8678, Manufacturer="MDD(Microdiode Semiconductor)", Package=SMA(DO-214AC), Voltage - DC Reverse(Vr)=40V, Link=https://www.lcsc.com/product-detail/C8678.html?s_z=n_SS34, Mfr. Part #=SS34
D3 D4: library part "Diode SMD", "Default Diode", Code - JEDEC=DO-214-AB, Published=8-Jun-2000, Publisher="Altium Limited", Revision="July-2002: Re-released for DXP Platform."
D5 D6 D8: "DIODE STANDARD 1kV 1A SOD-323", LCSC Part #=C193404, Manufacturer="MDD(Microdiode Semiconductor)", Package=SOD-323, Link=https://www.lcsc.com/product-detail/C193404.html?utm_source=chatgpt.com, Mfr. Part #=1N4007WS
D7: library part "Schottky Dual Diode SMD", "Diode 30V 0.2A Surface Mount SOT-23", Datasheet=https://diotec.com/request/datasheet/bat54.pdf, ki_description="Dual Schottky Diode in Series", ki_keywords="Dual Schottky Diode Series"
D9: library part D0603_RED, "25mcd~40mcd Water Clear -40℃~+85℃ 624nm Red 120° 60mW 0402 LED Indication - Discrete ROHS", LCSC Part #=C965793, Manufacturer=XINGLIGHT, Mfr. Part #=XL-1005UGC, Package=0603, Power(Watts)=60mW, Voltage - Forward(Vf)=3V, Illumination Color=RED, Link=https://www.lcsc.com/product-detail/C136765.html?s_z=n_LED%25200402%2520RED
H1: library part J_4P_XH2.54, "1kV 1 2.54mm Pin Header 3A 2.5mm Through Hole 6mm -40℃~+105℃ 3mm Gold 4P Black 1x4P Through Hole,P=2.54mm Headers, Male Pins RoHS", LCSC Part #=C42431795, Manufacturer=JXTCONN, Link=https://www.lcsc.com/product-detail/C42431795.html?s_z=n_q_t_header%25204%2520p&spm=wm.fly.bg.0.xh___wm.ssy.tc.0.tz&lcsc_vid=FlRcBlcDRFNZAlJQT1RZBVJSEVFcX11eRVQPBFEHFgAxVlNeQVVcV1RRRlFeUzsOAxUeFF5JWBYZEEoKFBINSQcJGk4dAgUUFAk%3D, MPN=PZ2.54-S04P-A60, Packaging="Through Hole,P=2.54mm"
H2: library part JC_5P_XH2.0X_, "CONN SOCKET 5POS 2mm SINGLE ROW TH", LCSC Part #=C22436139, Manufacturer="Hong Cheng", Link=https://www.lcsc.com/product-detail/C22436139.html?utm_source=chatgpt.com, MPN=HC-PM200-4.3H-1x5PZ, Packaging="Through Hole,P=2mm"
H3: "CONN HEADER TH R/A 2POS 2.5mm", LCSC Part #=C7429641, Manufacturer=Megastar, Link=https://www.lcsc.com/product-detail/C7429641.html?utm_source=chatgpt.com, MPN=ZX-XH2.54-2PWZ, Packaging="Through Hole,Right Angle,P=2.5mm"
J1: "MOSFET N-CH 50V 0.22A SOT-23", LCSC Part #=C52895, Manufacturer=onsemi, Package=SOT-23, Link=https://www.lcsc.com/product-detail/C52895.html?s_z=n_q_x_bss138&spm=wm.ssy.em.0.tz&lcsc_vid=FFlaVlZURFlbX1EAE1lbUlZfQwdeBlBRQ1VZBFdQQwUxVlNeQlVeVVZeQlBWUTsOAxUeFF5JWBYZEEoKFBINSQcJGk4eFQsCAgIaSgADAwAHC0slTlBeX1dIHxUDCw%3D%3D, Mfr. Part #=BSS138
J2 J3 J4: library part AO3401, "30V 4A 900mV@250uA 1 P-Channel SOT-23 MOSFETs ROHS", Current - Continuous Drain(Id)=4A, Drain to Source Voltage=30V, LCSC Part #=C15127, Manufacturer=AOS, Package=SOT-23, Link=https://www.lcsc.com/product-detail/C15127.html?s_z=n_AO3401, Mfr. Part #=AO3401A
K1: "SWITCH TACTILE SPST TH R/A", LCSC Part #=C455252, Manufacturer=XUNPU, Package="Through Hole,Right Angle,4.5x4.5mm", Link=https://www.lcsc.com/product-detail/Tactile-Switches_XUNPU_C455252.html?utm_source=chatgpt.com, Mfr. Part #=TS-1009B-05026
L1: library part L0402_1nH, "FIXED IND 1nH 1A 70mΩ 0402", LCSC Part #=C162538, Manufacturer=muRata, Link=https://www.lcsc.com/product-detail/C162538.html?s_z=n_q_0402%2520inductor%25201nH&spm=wm.fly.bg.1.xh&lcsc_vid=FFlaVlZURFlbX1EAE1lbUlZfQwdeBlBRQ1VZBFdQQwUxVlNeQ1FfVlBVRFlZVjsOAxUeFF5JWBYZEEoKFBINSQcJGk4NBhADEA4cHktXRllfSQwSGg0%3D, MPN=LQG15HS1N0B02D, Packaging=0402
L2: "FIXED IND 24nH 280mA 520mΩ 0402", LCSC Part #=C167472, Manufacturer=muRata, Package=0402, Link=https://www.lcsc.com/product-detail/C167472.html?s_z=n_q_inductor%252024nH%25200402&spm=wm.fly.bg.0.xh&lcsc_vid=FlRcBlcDRFNZAlJQT1RZBVJSEVFcX11eRVQPBFEHFgAxVlNeQVRfUFJVQVNZUzsOAxUeFF5JWBYZEEoKFBINSQcJGk4eFQsCAgIaSgADAwAHC0slRlhdU1RSWQkaCgg%3D, Mfr. Part #=LQW15AN24NG00D
L3: library part L_0603_16.6nH, "700mA 16nH ±5% 170mΩ Wire-wound inductor 0603 Fixed Inductors", LCSC Part #=C54534274, Manufacturer=Coilank, Mfr. Part #=HWC1608J16ND, Package=0603, Inductance=16,6nH, Link=https://www.lcsc.com/product-detail/C54534274.html?s_z=n_q_0603%252016nH&spm=wm.fly.bg.0.xh&lcsc_vid=FlRcBlcDRFNZAlJQT1RZBVJSEVFcX11eRVQPBFEHFgAxVlNeQFZdV1BVRFZWVjsOAxUeFF5JWBYZEEoKFBINSQcJGk4NBhADEA4cHktXRllfSQwSGg0%3D
OUTPUT1: library part JP9x2_1, "WR-PHD 2.54 mm Dual Socket Header", Manufacturer="W¨¹rth Elektronik eiSos GmbH", partNo=61301821821, ComponentLink1 Description=Manufacturer, ComponentLink1URL=http://www.we-online.com, ComponentLink2 Description=Datasheet, ComponentLink2URL=http://katalog.we-online.de/em/datasheet/6130xx21821.pdf, Created by="Karrer Zheng", Created Date="29 March 2013", NoPins=18
Q1 Q2: library part SI2302DS, "N-Channel 20V 2.5A _Tc_ 830mW _Tc_ Surface Mount TO-236AB _SOT23_", Package=None, Availability=Unavailable, MF="NXP Semiconductors", MP=SI2302DS, Price=None, SnapEDA_Link=https://www.snapeda.com/parts/SI2302DS/NXP%20Semiconductors/view-part/4701514/?ref=snap
Q3 Q4 Q5 Q6: "MOSFET N-CH 30V SOT-23", LCSC Part #=C14385, Manufacturer=AOS, Link=https://www.lcsc.com/product-detail/C14385.html?s_z=n_q_ao3402&spm=wm.fly.bg.0.xh&lcsc_vid=FFlaVlZURFlbX1EAE1lbUlZfQwdeBlBRQ1VZBFdQQwUxVlNeRVZXVF1QQ1BYXzsOAxUeFF5JWBYZEEoKFBINSQcJGk4NBhADEA4cHktXR1FWSQwSGg0%3D, MPN=AO3402, Packaging=SOT-23
R1 R6 R7 R8 R9 R11 R13 R14 R17 R18 R19 R22 R24 R26 R28 R31 R33: library part R0603_10kΩ_±1%, "62.5mW Thick Film Resistor 50V ±1% ±200ppm/℃ 10Ω 0402 Chip Resistor - Surface Mount ROHS", LCSC Part #=C138066, Manufacturer=YAGEO, Mfr. Part #=RC0402FR-0710RL, Package=0603, Tolerance=±1%, Link=https://www.lcsc.com/product-detail/C138066.html?s_z=n_resistor%25200402%252010R, Resistance=10kΩ
R2 R3: library part R0603_0Ω_±5%, "100mW Thick Film Resistor 75V ±5% 0Ω 0603 Chip Resistor - Surface Mount ROHS", LCSC Part #=C95177, Manufacturer=YAGEO, Mfr. Part #=RC0603JR-070RL, Package=0603, Resistance=0Ω, Tolerance=±5%, Key Attributes="RES 0Ω ±5% 100mW 0603", Link=https://www.lcsc.com/product-detail/C138066.html?s_z=n_resistor%25200402%252010R
R4 R5 R36 R37 R38: library part R0603_33Ω_±5%, "100mW Thick Film Resistor 75V ±1% ±200ppm/℃ 2Ω 0603 Chip Resistor - Surface Mount ROHS", LCSC Part #=C185341, Manufacturer=YAGEO, Mfr. Part #=RC0603FR-072RL, Package=0603, Tolerance=±1%, Key Attributes="RES 0Ω ±5% 100mW 0603", Link=https://www.lcsc.com/product-detail/C185341.html?s_z=n_resistor%2520yageo%25202%25CE%25A9%25200603, Resistance=33Ω
R10 R12 R15 R16 R34: library part Res-SMD, "Resistor", Manufacturer="Generic Components", Class=Passive, Published=08/06/2000, Publisher="Altium Hobart Technology Centre"
R20 R25 R30: library part R0603_5k1Ω_±1%, "100mW Thick Film Resistor 75V ±100ppm/℃ ±1% 5.1kΩ 0603 Chip Resistor - Surface Mount ROHS", LCSC Part #=C2907044, Manufacturer=FOJAN, Mfr. Part #=FRC0603F5101TS, Package=0603, Tolerance=±1%, Key Attributes="RES 5.1kΩ ±1% 100mW 0603", Link=https://www.lcsc.com/product-detail/C2907044.html?s_z=n_5k1%25200603, Resistance=5k1Ω
R21: library part "R_2512_0Ω ±5%", "RES 0Ω ±5% 1W 2512", LCSC Part #=C2907567, Manufacturer=FOJAN, Link=https://www.lcsc.com/product-detail/C2907567.html?s_z=n_q_t_2512%25200R&spm=wm.fly.bg.0.xh___wm.ssy.tc.0.tz&lcsc_vid=FlRcBlcDRFNZAlJQT1RZBVJSEVFcX11eRVQPBFEHFgAxVlNeT1VcVV1UR1dZVTsOAxUeFF5JWBYZEEoKFBINSQcJGk4eFQsCAgIaSgADAwAHC0slT1dbXlRIHxUDCw%3D%3D, MPN="FRC2512P000 TS", Packaging=2512
R23 R27 R32 R35 R39: library part R0603_1kΩ_±1%, "62.5mW Thick Film Resistor 50V ±1% ±200ppm/℃ 10Ω 0402 Chip Resistor - Surface Mount ROHS", LCSC Part #=C138066, Manufacturer=YAGEO, Mfr. Part #=RC0402FR-0710RL, Package=0603, Tolerance=±1%, Link=https://www.lcsc.com/product-detail/C138066.html?s_z=n_resistor%25200402%252010R, Resistance=1kΩ
R29: library part R0603_33kΩ_±1%, Manufacturer=YAGEO, Resistance=33kΩ
RF1: library part Antenna
RL1 RL2: library part "Relay 1", "Relay SPDT,10A - 12VDC 5 Pin"
U1: library part "FIXED IND 4.7uH 6A 33mΩ SMD,0630", "FIXED IND 4.7uH 6A 33mΩ SMD,0630", LCSC Part #=C5307631, Manufacturer=XR, Link=https://www.lcsc.com/product-detail/C5307631.html?s_z=n_q_t_INDUCTOR%25200630&spm=wm.fly.bg.0.xh___wm.ssy.tc.0.tz&lcsc_vid=FFlaVlZURFlbX1EAE1lbUlZfQwdeBlBRQ1VZBFdQQwUxVlNeRlRfU1ZRQlNZXzsOAxUeFF5JWBYZEEoKFBINSQcJGk4eFQsCAgIaSgADAwAHC0slQ1ZXV1NWWQkaCgg%3D, MPN=XR0630-4R7M, Packaging=SMD,7x6.6mm
U2: "Linear Voltage Regulator IC Positive Fixed 1 Output 600mA SOT23-5", Package="SOT-753 Diodes Inc.", Availability="In Stock", Check_prices=https://www.snapeda.com/parts/AP2112K-3.3TRG1/Diodes+Inc./view-part/?ref=eda, MF="Diodes Inc.", MP=AP2112K-3.3TRG1, Price=None, Purchase-URL=https://pricing.snapeda.com/search/part/AP2112K-3.3TRG1/?ref=eda, SnapEDA_Link=https://www.snapeda.com/parts/AP2112K-3.3TRG1/Diodes+Inc./view-part/?ref=snap
U3: "150KHz 3A PWM Buck DC/DC Converter", LCSC Part #=C42376977, Manufacturer=UMW, Link=https://www.lcsc.com/product-detail/C42376977.html?s_z=n_q_xl1509&spm=wm.fly.bg.0.xh&lcsc_vid=FlRcBlcDRFNZAlJQT1RZBVJSEVFcX11eRVQPBFEHFgAxVlNeT1VdVlFURVJWXjsOAxUeFF5JWBYZEEoKFBINSQcJGk4eFQsCAgIaSgADAwAHC0slRVheUFFQQE8GEwkK, MPN=XXL1509-5.0, Packaging=SOP-8
U4: "Others 160MHz QFN-32-EP(5x5) RF Transceiver Modules and Modems RoHS", LCSC Part #=C2838500, Manufacturer=ESPRESSIF, Package=QFN-32-EP(5x5), Link=https://www.lcsc.com/product-detail/C2838500.html?s_z=n_ESP32%2520C3, MPN=ESP32-C3
U5: "433/315 MHz wireless receiver chips", LCSC Part #=C916347, Manufacturer=JSMSEMI, Link=https://www.lcsc.com/product-detail/C916347.html?s_z=n_q_SYN480R&spm=wm.fly.bg.0.xh&lcsc_vid=FlRcBlcDRFNZAlJQT1RZBVJSEVFcX11eRVQPBFEHFgAxVlNeQVVdUFxQR1VXUDsOAxUeFF5JWBYZEEoKFBINSQcJGk4eFQsCAgIaSgADAwAHC0sRHhMLShAJWgMBBhYCWgIBCQoDFBUBFTsLEgYPFBAHBUwUH0kODlNDV0lVBxYaOCdRQ1NXUlNWWQkaCgg%3D, MPN=SYN480R, Packaging=SOP-8
U6: "Brushed DC motor driver (PWM control)", LCSC Part #=C86590, Manufacturer=TI, Link=https://www.lcsc.com/product-detail/C86590.html?s_z=n_q_DRV8870&spm=wm.fly.bg.1.xh&lcsc_vid=FlRcBlcDRFNZAlJQT1RZBVJSEVFcX11eRVQPBFEHFgAxVlNeT1VcV1ZUQVZXXzsOAxUeFF5JWBYZEEoKFBINSQcJGk4%3D, MPN=DRV8870DDAR, Packaging=HSOP-8-EP
U7: "8-bit serial-in, serial or parallel-out shift register with output latches; 3-state", LCSC Part #=C5948, Manufacturer=Nexperia, Link=https://www.lcsc.com/product-detail/C5948.html?utm_source=chatgpt.com, MPN=74HC595PW,118, Packaging=TSSOP-16
U8: "1.5A Dual High-Speed Power MOSFET Drivers", LCSC Part #=C636894, Manufacturer=MICROCHIP, Link=https://www.lcsc.com/product-detail/C636894.html?s_z=n_q_TC4428AE&spm=wm.fly.bg.3.xh&lcsc_vid=FlRcBlcDRFNZAlJQT1RZBVJSEVFcX11eRVQPBFEHFgAxVlNeT1VdVVVeQ1FZUjsOAxUeFF5JWBYZEEoKFBINSQcJGk4NBhADEA4cHktXR1NXSQwSGg0%3D, MPN=TC4428AEOA, Packaging=SOIC-8
U9: library part TJA1050, "1/1 Transceiver Half CANbus 8-SO", Package="SOIC-8 NXP USA", Availability=Unavailable, MF="NXP USA", MP=TJA1050, Price=None, SnapEDA_Link=https://www.snapeda.com/parts/TJA1050/NXP%20USA%20Inc./view-part/562764/?ref=snap

## Via types
v1: diameter 0.508, hole 0.254, Top Layer to Bottom Layer, tented both sides, 393 vias
v2: diameter 0.61, hole 0.305, Top Layer to Bottom Layer, tented both sides, 4 vias
v3: diameter 1.5, hole 0.8, Top Layer to Bottom Layer, tented both sides, 1 vias

## Nets (pads, with @x,y where several pads share a name; then routed paths per layer and width w, separated by ;. In a path a pad name is that pad's centre, name@x,y a point inside that pad or via, vN(x,y) a via of type N, cw(c..) or ccw(c..) an arc to the next point about the centre after c; other vN are vias at no path point)
+3.3: C4.1 C5.1 C9.1 C10.1 C11.1 C12.1 C23.1 C28.1 CN15.1 D7.2 H2.1 J1.1 R1.1 R6.2 R7.2 R8.2 R9.2 R11.1 R14.1 R17.2 R18.2 TP1.1 U2.5 U4.2 U4.3 U4.11 U4.17 U4.31 U4.32 U5.3 U7.10 U7.16 | length 156.3
  Top Layer w0.254: U2.5@-42.552,-24.604 -41.944,-24.604 v1(-41.91,-24.638) ; v1(-42.547,-16.907) -42.547,-16.975 -42.369,-17.153 -42.369,-17.182 -41.483,-18.068 -41.433,-18.068 -41.16,-18.341 C11.1@-41.16,-18.391 -41.087,-18.318 -40.543,-18.318 -39.764,-17.539 -39.764,-13.774 -39.459,-13.469 -38.747,-13.469 -38.505,-13.711 U4.11@-37.403,-13.711 ; v1(-42.106,-11.48) -42.67,-11.48 R1.1@-42.675,-11.475 -42.62,-11.419 -42.62,-10.811 -42.35,-10.541 -40.773,-10.541 -39.627,-9.396 R9.2@-39.627,-9.367 -39.627,-9.338 -38.798,-8.509 -37.116,-8.509 -36.498,-9.127 C9.1@-35.445,-9.127 -35.174,-9.398 -34.544,-9.398 -34.175,-9.767 U4.3@-34.175,-11.983 ; v1(-39.751,-27.813) -39.746,-27.818 -39.746,-28.199 -38.354,-29.591 -38.354,-31.115 -36.703,-32.766 v1(-34.29,-32.766) ; R7.2@-37.321,-20.729 -36.322,-19.729 -36.322,-18.034 -36.703,-17.653 -36.688,-17.638 -36.688,-16.951 U4.17@-36.675,-16.938 ; U4.31@-32.447,-13.211 -32.434,-13.198 -32.054,-13.198 -30.48,-11.624 -28.894,-10.038 -26.03,-10.038 -24.511,-11.557 -21.036,-11.557 D7.2@-19.595,-12.998 ; U7.16@-29.421,-30.641 -28.819,-30.641 -28.778,-30.682 -28.778,-30.966 -28.63,-31.115 -26.924,-31.115 -26.67,-30.861 v1(-26.67,-27.432) ; U7.10@-29.421,-26.741 -27.813,-26.741 -27.669,-26.597 R6.2@-27.669,-24.765 -27.669,-24.736 -28.321,-24.084 -28.321,-17.907 ; v1(-27.813,-27.432) -27.813,-26.797 ; J1.1@-23.307,-19.085 -23.272,-19.12 -22.427,-19.12 -22.022,-19.524 -22.022,-19.553 -21.746,-19.829 -20.756,-19.829 -20.22,-19.293 -20.22,-13.923 -19.595,-13.298 D7.2@-19.595,-13.148 D7.2@-19.595,-12.998 ; R11.1@-5.08,-8.89 -6.218,-8.89 -6.223,-8.895 ; U5.3@-4.699,-18.288 -6.604,-18.288 -7.874,-17.018 C23.1@-7.874,-15.367 -7.874,-11.049 -6.223,-9.398 -6.223,-8.895 ; D7.2@-19.595,-12.998 -19.595,-7.784 -17.272,-5.461 -17.272,-3.683 -16.256,-2.667 -10.877,-2.667 H2.1@-9.347,-1.137 -6.483,-1.137 -6.223,-1.397 -6.223,-8.895
  Top Layer w0.381: C5.1@-41.16,-21.185 -39.232,-21.185 -38.776,-20.729 R8.2@-38.747,-20.729 R7.2@-37.35,-20.729 -37.321,-20.729 -32.54,-20.729 -29.718,-17.907 -28.321,-17.907 -24.25,-17.907 -23.307,-18.85 J1.1@-23.307,-19.085
  Bottom Layer w0.254: v1(-42.547,-16.907) -42.547,-11.936 -42.106,-11.494 v1(-42.106,-11.48) ; TP1.1@-41.402,-24.638 -41.402,-28.404 R18.2@-41.373,-28.433 ; v1(-39.751,-27.813) -39.751,-28.404 R17.2@-39.722,-28.433 ; CN15.1@-34.95,-33.02 -34.544,-33.02 v1(-34.29,-32.766) ; v1(-27.813,-27.432) v1(-26.67,-27.432)
BUTTON: C20.2 K1.1 R9.1 R11.2 TP4.1 U4.6 | length 66.8
  Top Layer w0.178: v1(-38.481,-10.922) -38.399,-10.84 -38.399,-10.851 -38.328,-10.922 -37.344,-10.922 -37.262,-10.84 -36.277,-10.84 -35.675,-11.442 U4.6@-35.675,-11.983 ; v1@-38.481,-10.851 -38.481,-9.756 -38.121,-9.396 R9.1@-38.121,-9.367 ; C20.2@-5.08,-11.811 R11.2@-5.08,-10.397 -4.252,-10.397 K1.1@-2.855,-9
  Bottom Layer w0.178: v1(-38.481,-10.922) -38.481,-11.938 -40.076,-13.533 -40.076,-19.507 -36.774,-22.809 -27.508,-22.809 -12.319,-7.62 -4.191,-7.62 TP4.1@-2.921,-6.35 -2.921,-6.985 -2.888,-7.018 -2.888,-8.967 K1.1@-2.855,-9
CAN_N: C33.1 OUTPUT1.6 R36.2 | length 51.6
  Top Layer w0.178: C33.1@-36.207,-31.668 -34.781,-31.668 -34.162,-31.049 -32.881,-31.049 -32.716,-30.884 -31.194,-30.884 -29.971,-32.106 -28.378,-32.106 -28.251,-31.979 -26.812,-31.979 -26.773,-31.94 -26.606,-31.94 v1(-26.543,-31.877) ; v1(-15.113,-41.694) -15.113,-41.732 -14.986,-41.859 -11.431,-41.859 -5.753,-47.536 -5.664,-47.626 -5.664,-50.037 -5.753,-50.127 -6.554,-50.927 -11.259,-50.927 OUTPUT1.6@-12.461,-52.128
  Bottom Layer w0.178: v1(-26.543,-31.877) -26.074,-32.346 -26.074,-38.315 -24.638,-39.751 -17.056,-39.751 v1(-15.113,-41.694)
CAN_P: C32.1 OUTPUT1.4 R37.2 | length 52.8
  Top Layer w0.178: R37.2@-33.54,-31.668 C32.1@-32.143,-31.668 -31.832,-31.357 -31.706,-31.357 -31.678,-31.329 -31.378,-31.329 -30.155,-32.551 -28.194,-32.551 -28.067,-32.424 -26.827,-32.424 -26.788,-32.464 -26.621,-32.464 v1(-26.558,-32.527) ; OUTPUT1.4@-17.541,-52.128 -16.034,-50.622 -6.68,-50.622 -5.969,-49.911 -5.969,-47.752 -11.557,-42.164 -14.986,-42.164 -15.113,-42.291 v1(-15.113,-42.329)
  Bottom Layer w0.178: v1(-26.558,-32.527) -26.495,-32.59 -26.495,-33.02 -26.379,-33.136 -26.379,-38.441 -24.764,-40.056 -17.386,-40.056 -15.583,-41.859 -15.583,-41.889 -15.143,-42.329 v1(-15.113,-42.329)
CAN_RXD: R5.1 U9.4 | length 1.6
  Top Layer w0.178: R5.1@-37.486,-22.397 -36.293,-22.397 -36.08,-22.61 U9.4@-36.08,-22.753
CAN_TXD: R4.1 U9.1 | length 1.5
  Top Layer w0.254: U9.1@-32.27,-22.753 -30.754,-22.753 R4.1@-30.734,-22.733
CAR_ACC: D5.2 J2.3 OUTPUT1.3 | length 9.3
  Top Layer w0.178: OUTPUT1.3@-20.081,-52.128 -20.081,-51.978 -18.833,-50.731 -18.833,-48.318 -17.15,-46.635 D5.2@-17,-46.635 -17,-44.21 J2.3@-17.03,-44.18
CAR_ANT_1: H3.1 U8.5 | length 3.9
  Top Layer w0.178: U8.5@-10.354,-7.62 -9.748,-7.62 -8.281,-6.153 -8.281,-5.848 H3.1@-7.62,-5.187
CAR_ANT_2: H3.2 U8.7 | length 3.8
  Top Layer w0.178: U8.7@-10.354,-5.08 -9.859,-5.08 -7.62,-2.841 H3.2@-7.62,-2.687
CAR_ANT_3: J1.3 OUTPUT1.12 R13.2 | length 50
  Top Layer w0.178: R13.2@-26.797,-19.956 -25.002,-19.956 v1(-24.257,-20.701) J1.3@-24.257,-21.555
  Bottom Layer w0.178: v1(-24.257,-20.701) -23.025,-19.469 -17.361,-19.469 -16.442,-20.388 -16.442,-24.452 -9.537,-31.357 -9.537,-42.971 -11.163,-44.597 -11.163,-49.635 -11.989,-50.462 -13.845,-50.462 -15.001,-49.307 OUTPUT1.12@-15.001,-49.157